# EAGLE board bq25570_board_full_large_pin_altered (EAGLE 7.2.0)
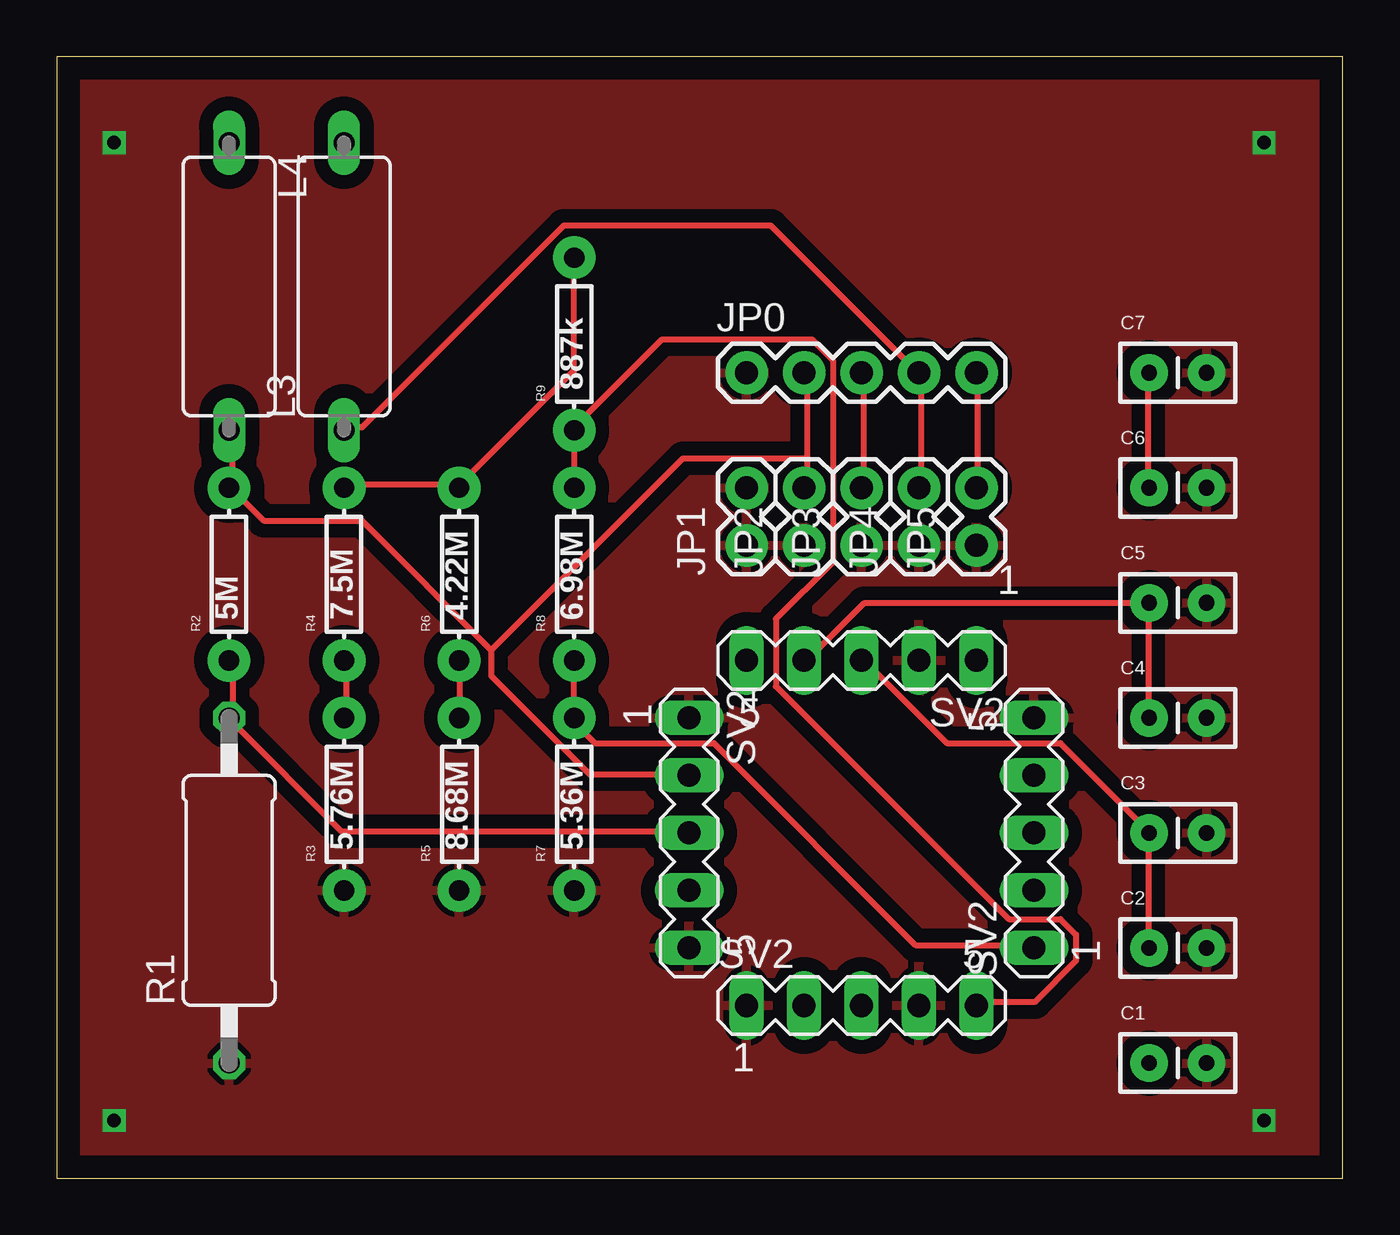
[diagram p0: board, top side]
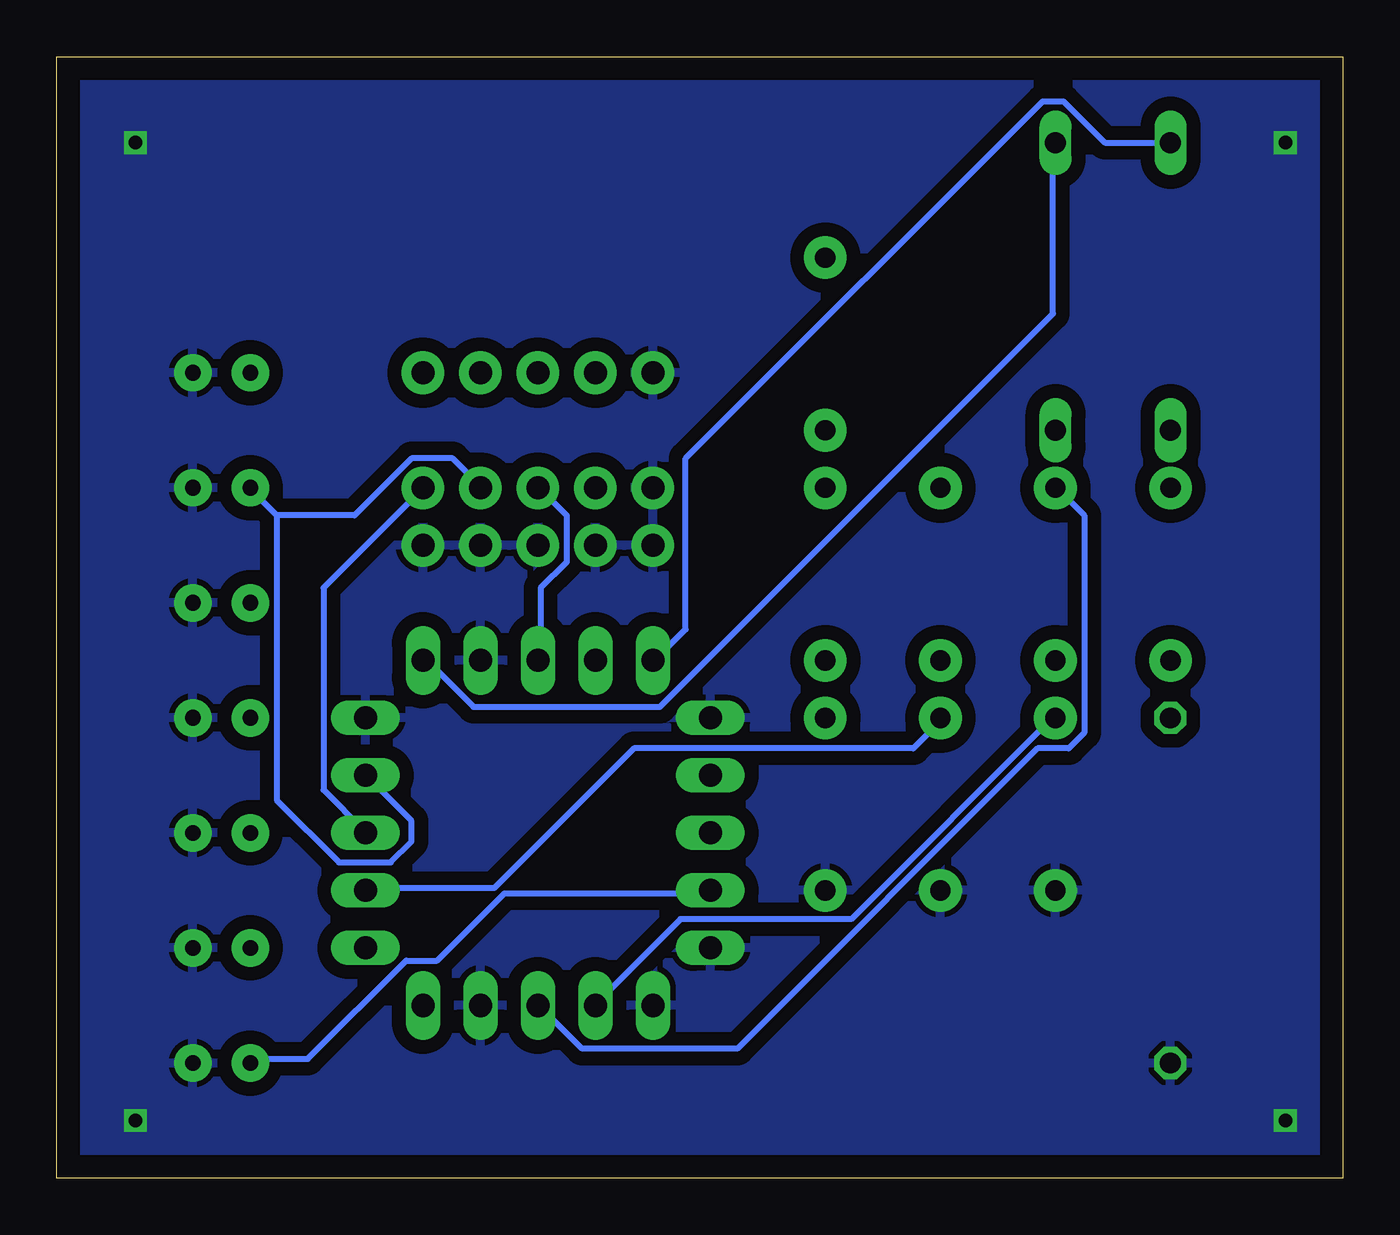
[diagram p1: board, bottom side, seen from below]

Size 56.82 x 49.52 mm. Coordinates in mm from the lower left corner, seen from the top.
Outline: 0,0 56.82,0 56.82,49.52 0,49.52 0,0
Copper layers (1*16): Top 0.035mm / dielectric 1.5mm / Bottom 0.035mm
Design rules "default": minimum track width 10mil, minimum drill 24mil, track to track 8mil, track to pad 8mil, pad to pad 8mil, via to via 8mil, smd to smd 8mil, copper to edge 40mil, drill to drill 8mil, minimum pad ring 10mil, minimum via ring 8mil, stop-mask expansion 4mil, vias tented up to drill 0mil, thermal gap 10mil

## Footprints (pad centres in the part's own frame; a part is rotated, then mirrored left to right if it is on the bottom)
CAP-PTH-SMALLEZ = drill 0.7 pad 1.651: 1 0,0; 2 2.54,0
1X05 = drill 1.016 pad 1.88: 1 0,0; 2 2.54,0; 3 5.08,0; 4 7.62,0; 5 10.16,0
1X02 = drill 1.016 pad 1.88: 1 0,0; 2 2.54,0
BC12 = drill 0.914 long: 1 -6.35,0; 2 6.35,0
0411/15 = drill 0.914 octagon: 1 -7.62,0; 2 7.62,0
AXIAL-0.3 = drill 0.9 pad 1.88: P$1 -3.81,0; P$2 3.81,0
MA05-1 = drill 1.016 long: 1 -7.62,5.08; 2 -7.62,2.54; 3 -7.62,0; 4 -7.62,-2.54; 5 -7.62,-5.08; 6 -5.08,-7.62; 7 -2.54,-7.62; 8 0,-7.62; 9 2.54,-7.62; 10 5.08,-7.62; 11 7.62,-5.08; 12 7.62,-2.54; 13 7.62,0; 14 7.62,2.54; 15 7.62,5.08; 16 5.08,7.62; 17 2.54,7.62; 18 0,7.62; 19 -2.54,7.62; 20 -5.08,7.62

## Placement (x,y rotation side)
C1  0.01uF  [CAP-PTH-SMALLEZ]  48.26,5.08 0 top
C2  100uF  [CAP-PTH-SMALLEZ]  48.26,10.16 0 top
C3  100uF  [CAP-PTH-SMALLEZ]  48.26,15.24 0 top
C4  4.7uF  [CAP-PTH-SMALLEZ]  48.26,20.32 0 top
C5  0.1uF  [CAP-PTH-SMALLEZ]  48.26,25.4 0 top
C6  22uF  [CAP-PTH-SMALLEZ]  48.26,30.48 0 top
C7  1000uF  [CAP-PTH-SMALLEZ]  48.26,35.56 0 top
JP0  [1X05]  30.48,35.56 0 top
JP1  [1X02]  30.48,27.94 90 top
JP2  [1X02]  33.02,27.94 90 top
JP3  [1X02]  35.56,27.94 90 top
JP4  [1X02]  38.1,27.94 90 top
JP5  [1X02]  40.64,27.94 90 top
L3  10uH  [BC12]  12.7,39.37 90 top
L4  22uH  [BC12]  7.62,39.37 270 top
R1  15M  [0411/15]  7.62,12.7 90 top
R2  5M  [AXIAL-0.3]  7.62,26.67 90 top
R3  5.76M  [AXIAL-0.3]  12.7,16.51 90 top
R4  7.5M  [AXIAL-0.3]  12.7,26.67 90 top
R5  8.68M  [AXIAL-0.3]  17.78,16.51 90 top
R6  4.22M  [AXIAL-0.3]  17.78,26.67 90 top
R7  5.36M  [AXIAL-0.3]  22.86,16.51 90 top
R8  6.98M  [AXIAL-0.3]  22.86,26.67 90 top
R9  887k  [AXIAL-0.3]  22.86,36.83 90 top
SV2  [MA05-1]  35.56,15.24 0 top

## Library data of the parts
C1-C7 = SparkFun-Capacitors
JP0 JP1-JP5 = SparkFun-Connectors
L3 L4 = inductors
R1 = resistor
R2-R9 = SparkFun-Resistors; PROD_ID: RES-12182
SV2 = bq25570_board; OC_FARNELL: unknown; OC_NEWARK: unknown

## Nets
LBOOST: L4.1 SV2.20
LBUCK: L3.2 SV2.16
OK_HYST: R8.P$2 R9.P$1 SV2.10
OK_PROG: R7.P$2 R8.P$1 SV2.11
VBAT: C2.1 C3.1 JP0.3 JP3.2 SV2.18
VBAT_OK: JP0.5 JP5.2 SV2.13
VBAT_OV: R3.P$2 R4.P$1 SV2.7
VIN: JP0.2 JP2.2 L4.2 R2.P$2 SV2.2
VOC_SAMP: R1.2 R2.P$1 SV2.3
VOUT: C6.1 C7.1 JP0.4 JP4.2 L3.1 SV2.14
VOUT_SET: R5.P$2 R6.P$1 SV2.12
VRDIV: R4.P$2 R6.P$2 R9.P$2 SV2.8
VREF_SAMP: C1.1 SV2.4
VSS: C1.2 C2.2 C3.2 C4.2 C5.2 C6.2 C7.2 JP0.1 JP1.1 JP1.2 JP2.1 JP3.1 JP4.1 JP5.1 R1.1 R3.P$1 R5.P$1 R7.P$1 SV2.1 SV2.5 SV2.6 SV2.9 SV2.15 SV2.17
VSTOR: C4.1 C5.1 SV2.19

## Tracks (layer width: path | path; a pad name or v marks a point on that pad's centre or on a via)
LBOOST
  Bottom 0.254: L4.1 10.52,45.72 12.34,47.55 13.26,47.55 29.03,31.77 29.03,24.23 30.4,22.86 SV2.20
LBUCK
  Bottom 0.254: L3.2 12.8,45.72 12.8,38.18 30.18,20.8 38.41,20.8 40.46,22.86 SV2.16
OK_HYST
  Top 0.254: SV2.10 40.69,7.77 43.2,7.77 45.03,9.6 45.03,10.74 44.35,11.43 42.06,11.43 31.77,21.72 31.77,24.69 34.29,27.2 34.29,36.12 33.38,37.03 26.75,37.03 22.86,33.15 R9.P$1 R8.P$2
OK_PROG
  Top 0.254: SV2.11 42.98,10.29 37.95,10.29 29.03,19.2 23.77,19.2 22.86,20.12 R7.P$2 R8.P$1
VBAT
  Top 0.254: C2.1 48.23,10.29 48.23,15.09 C3.1 48.23,15.32 44.35,19.2 39.32,19.2 35.66,22.86 SV2.18 | JP0.3 35.66,35.43 35.66,30.63 JP3.2
  Bottom 0.254: SV2.18 35.43,22.86 35.43,26.06 34.29,27.2 34.29,29.26 35.43,30.4 JP3.2
VBAT_OK
  Top 0.254: JP0.5 40.69,35.43 40.69,30.63 JP5.2
  Bottom 0.254: SV2.13 43.2,15.32 45.03,17.14 45.03,26.06 40.69,30.4 JP5.2
VBAT_OV
  Top 0.254: R4.P$1 12.8,22.86 12.8,20.34 R3.P$2
  Bottom 0.254: SV2.7 32.92,7.77 29.26,11.43 21.72,11.43 12.8,20.34 R3.P$2
VIN
  Top 0.254: 33.15,31.77 33.15,35.43 JP0.2 | 33.15,31.77 33.15,30.63 JP2.2 | L4.2 7.77,32.92 7.77,30.63 R2.P$2 7.77,30.4 9.14,29.03 13.49,29.03 19.2,23.32 | 19.2,23.32 19.2,22.17 23.55,17.83 27.89,17.83 SV2.2 | 33.15,31.77 27.66,31.77 19.2,23.32
VOC_SAMP
  Top 0.254: R2.P$1 7.77,22.86 7.77,20.34 R1.2 7.77,20.12 12.57,15.32 27.89,15.32 SV2.3
VOUT
  Top 0.254: C7.1 48.23,35.43 48.23,30.63 C6.1 | L3.1 12.8,33.15 13.49,33.15 22.4,42.06 31.55,42.06 37.95,35.66 JP0.4 38.18,35.43 38.18,30.63 JP4.2
  Bottom 0.254: 47.09,29.26 47.09,16.69 44.35,13.95 42.06,13.95 41.15,14.86 41.15,15.77 42.98,17.6 SV2.14 | 47.09,29.26 48.23,30.4 C6.1 | 47.09,29.26 43.66,29.26 41.15,31.77 39.32,31.77 38.18,30.63 JP4.2
VOUT_SET
  Top 0.254: R6.P$1 17.83,22.86 17.83,20.34 R5.P$2
  Bottom 0.254: SV2.12 42.98,12.8 37.49,12.8 31.32,18.97 18.97,18.97 17.83,20.12 R5.P$2
VRDIV
  Top 0.254: R4.P$2 12.8,30.63 17.6,30.63 R6.P$2 17.83,30.63 22.86,35.66 R9.P$2
  Bottom 0.254: SV2.8 35.43,7.54 33.6,5.71 26.75,5.71 13.49,18.97 12.12,18.97 11.43,19.66 11.43,29.26 12.57,30.4 R4.P$2
VREF_SAMP
  Bottom 0.254: SV2.4 28.12,12.57 37.03,12.57 40.01,9.6 41.38,9.6 45.72,5.26 48.23,5.26 C1.1
VSS  (via drill 0.6)
  other vias: 2.54,2.54 53.34,2.54 53.34,45.72 2.54,45.72
  pour Bottom (isolate 0.61): 0,0 55.88,0 55.88,50.8 0,50.8
  pour Top (isolate 0.61): 0,0 55.88,0 55.88,50.8 0,50.8
VSTOR
  Top 0.254: 48.23,25.38 35.66,25.38 33.15,22.86 SV2.19 | 48.23,25.38 48.23,20.34 C4.1 | 48.23,25.38 C5.1